# Altium PCB deserializer.PcbDoc (part 1 of 2)
Units mm, origin at the board's own origin, x right, y up, seen from the top; angles counter-clockwise.
Board outline 30 x 20 mm, 8 copper layers (Top Layer, L2 - GND, L3 - SIG, L4 - GND, L5 - PWR, L6 - SIG, L7 - GND, Bottom Layer), stack 1.6 mm thick; 98 components, 66 nets, 306 pads, 169 vias.
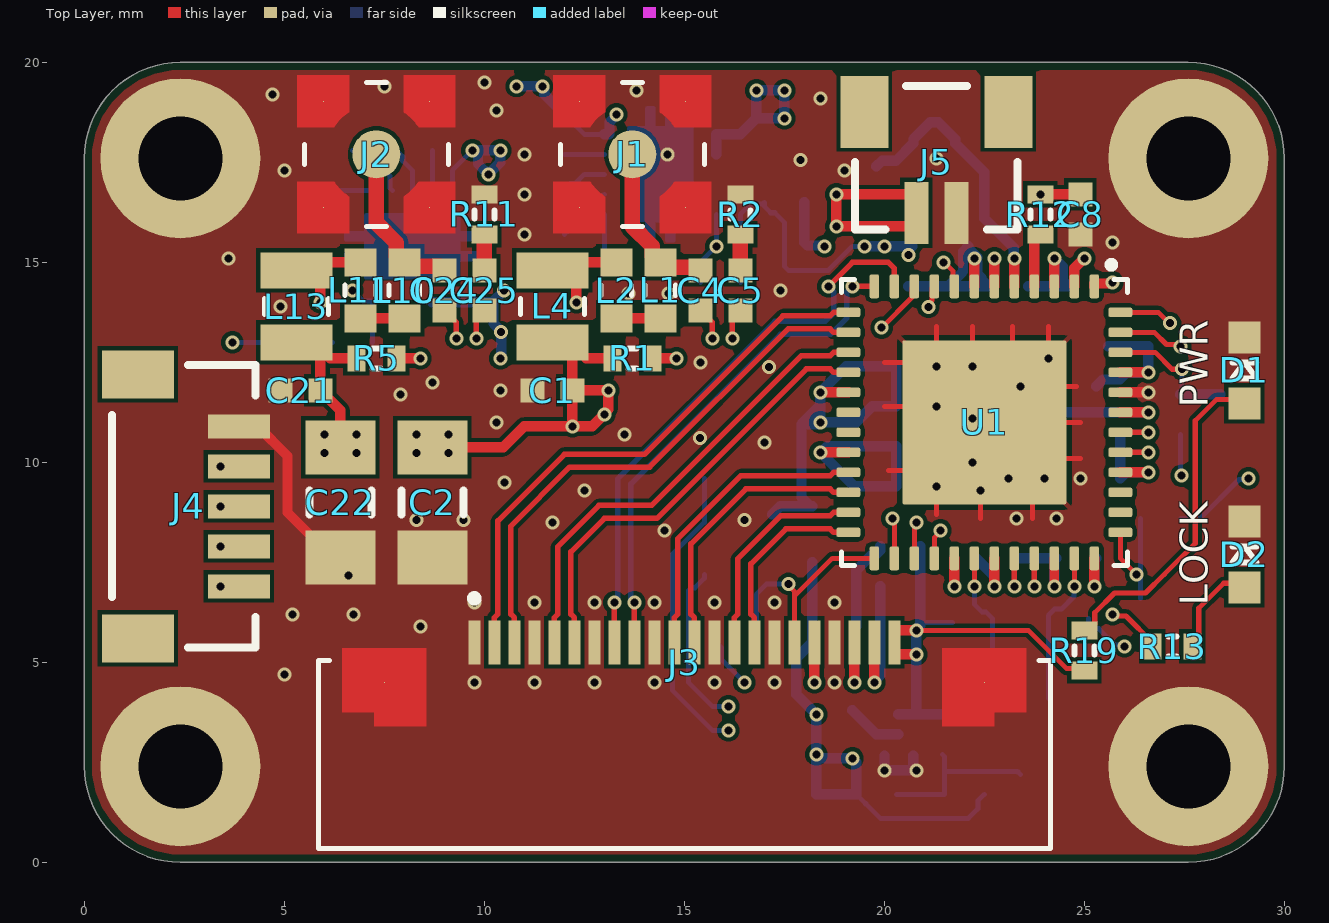
[diagram p0: Top Layer view]
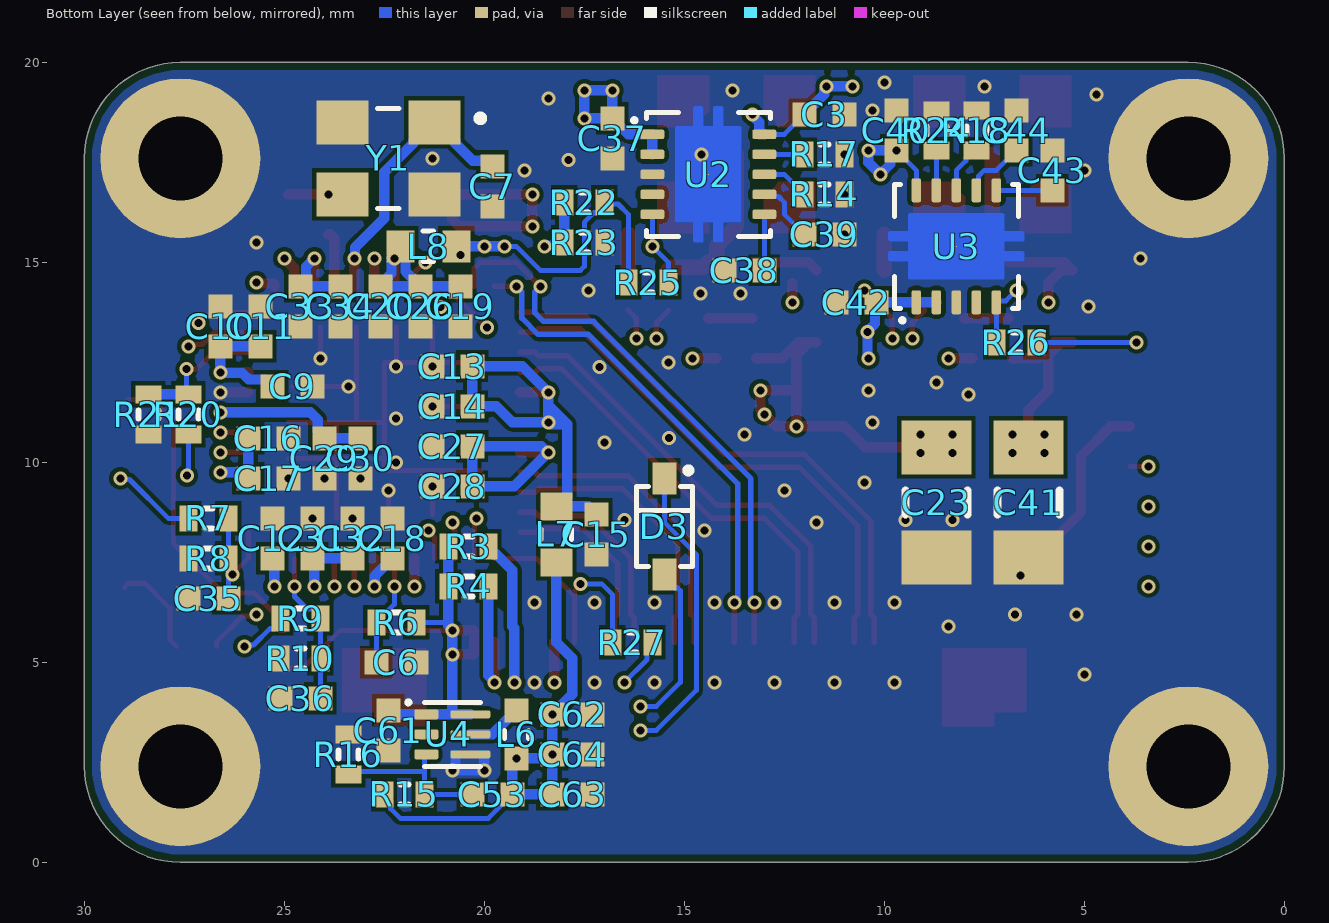
[diagram p1: Bottom Layer view, seen from below]
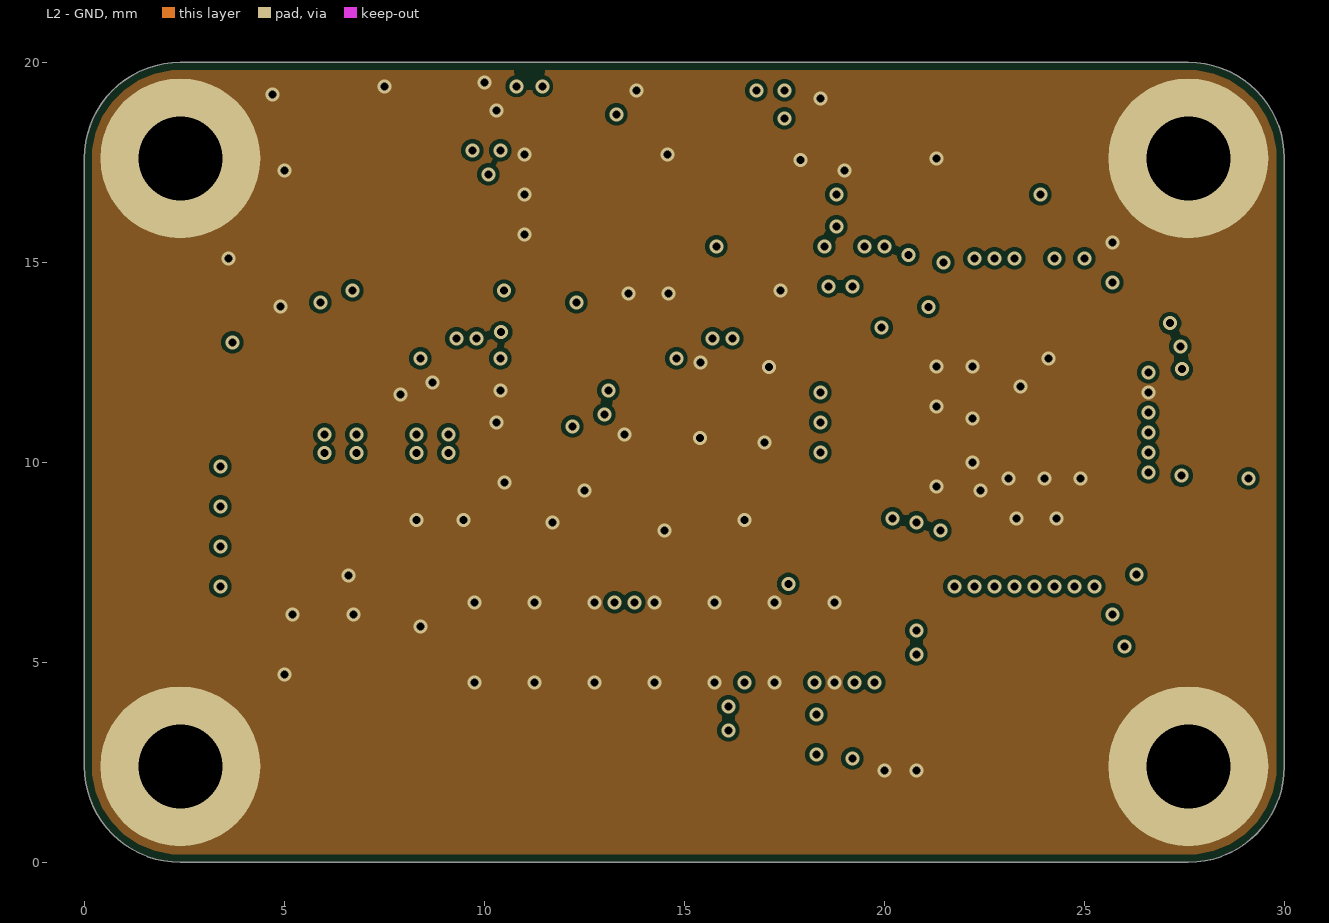
[diagram p2: L2 - GND]
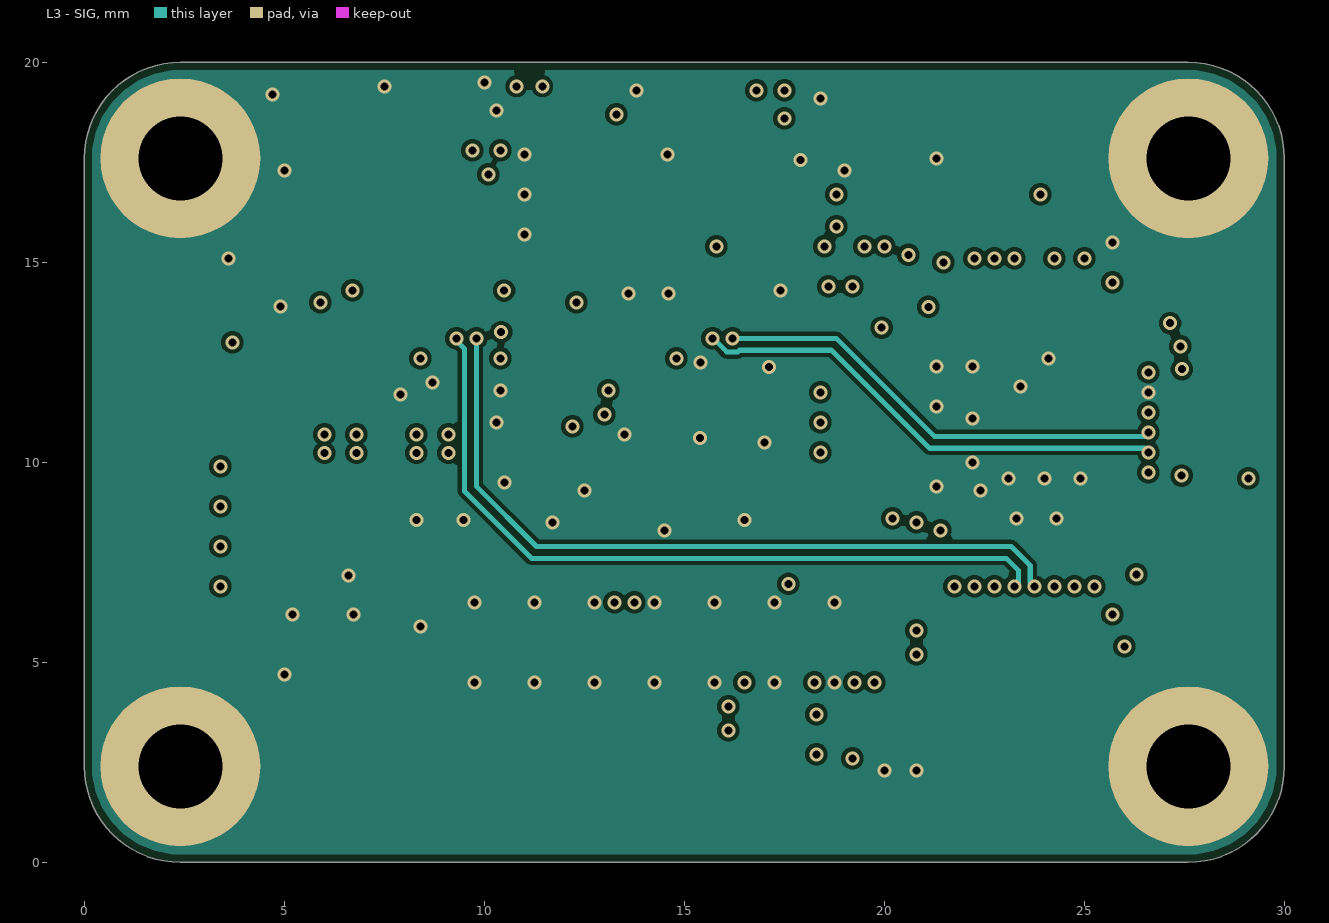
[diagram p3: L3 - SIG]
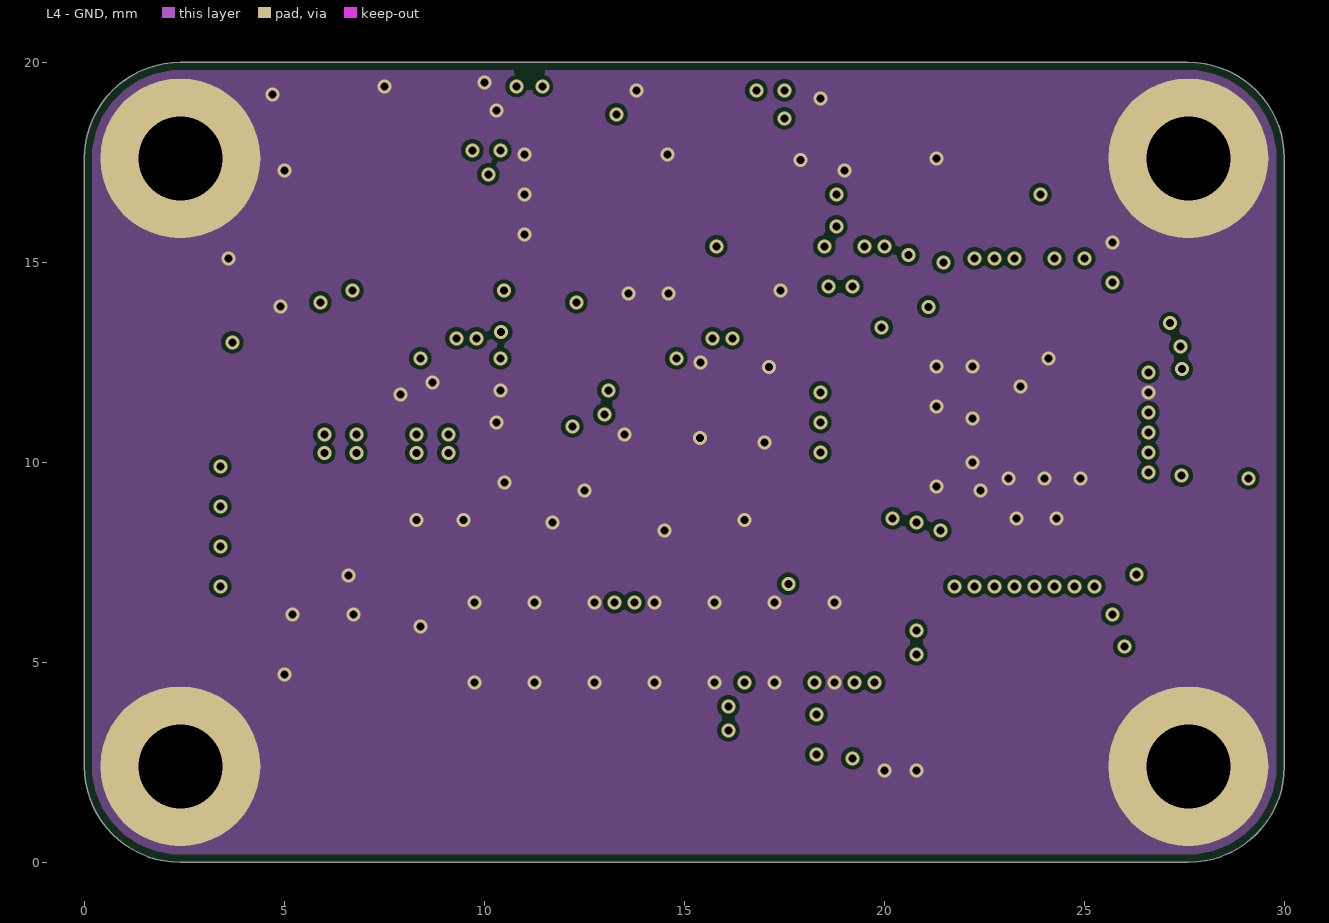
[diagram p4: L4 - GND]
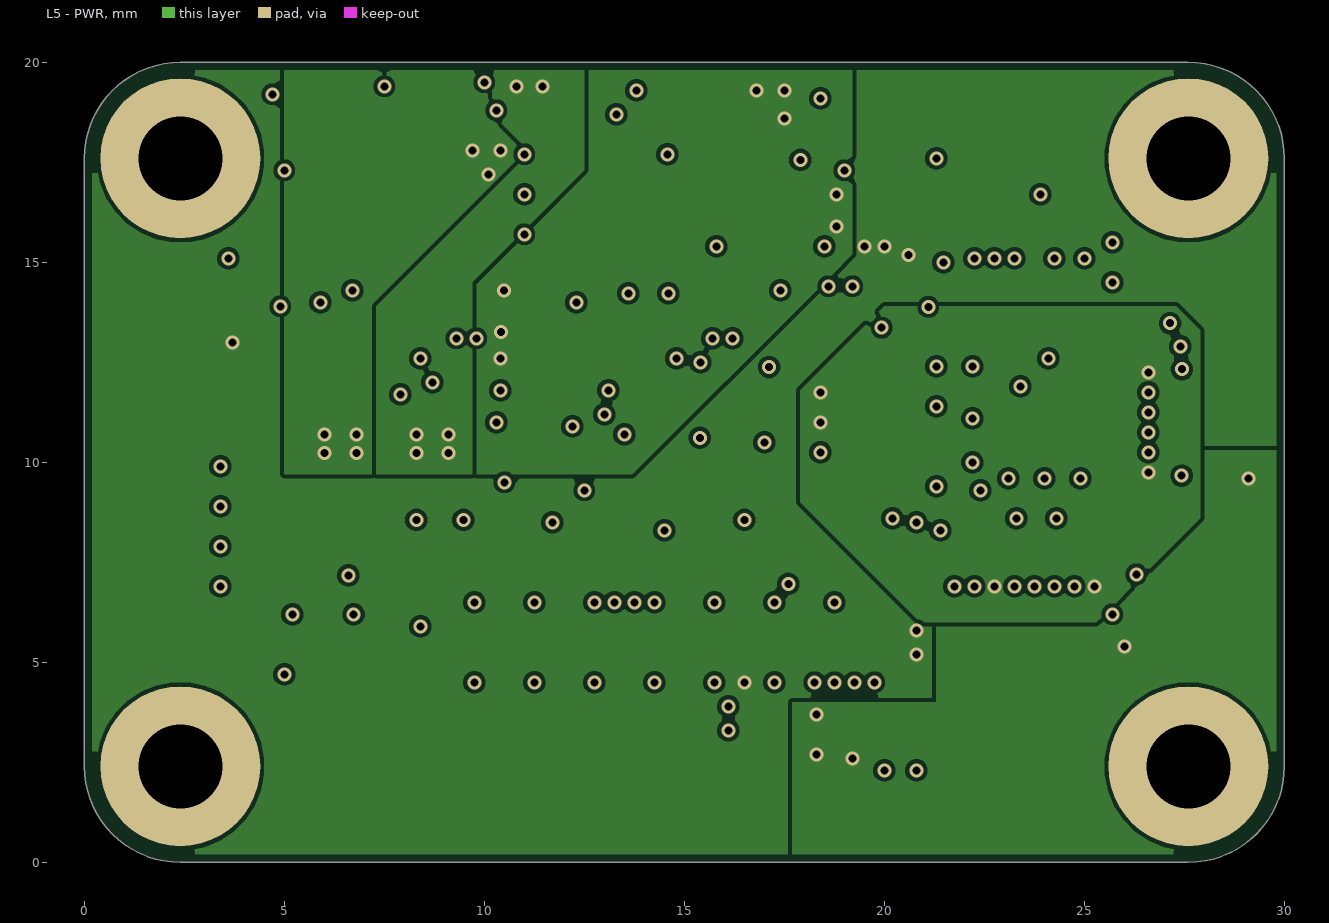
[diagram p5: L5 - PWR]
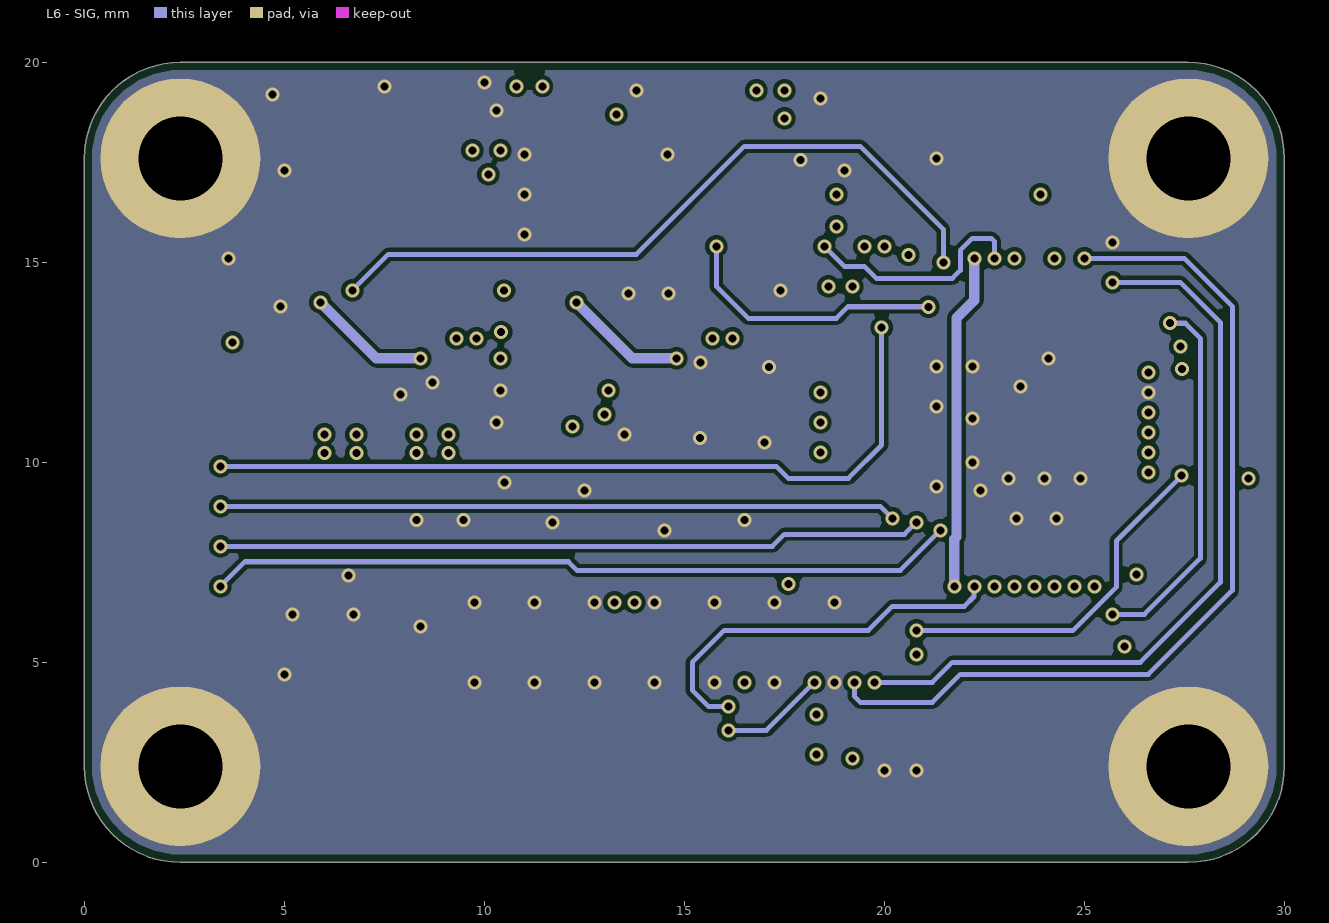
[diagram p6: L6 - SIG]
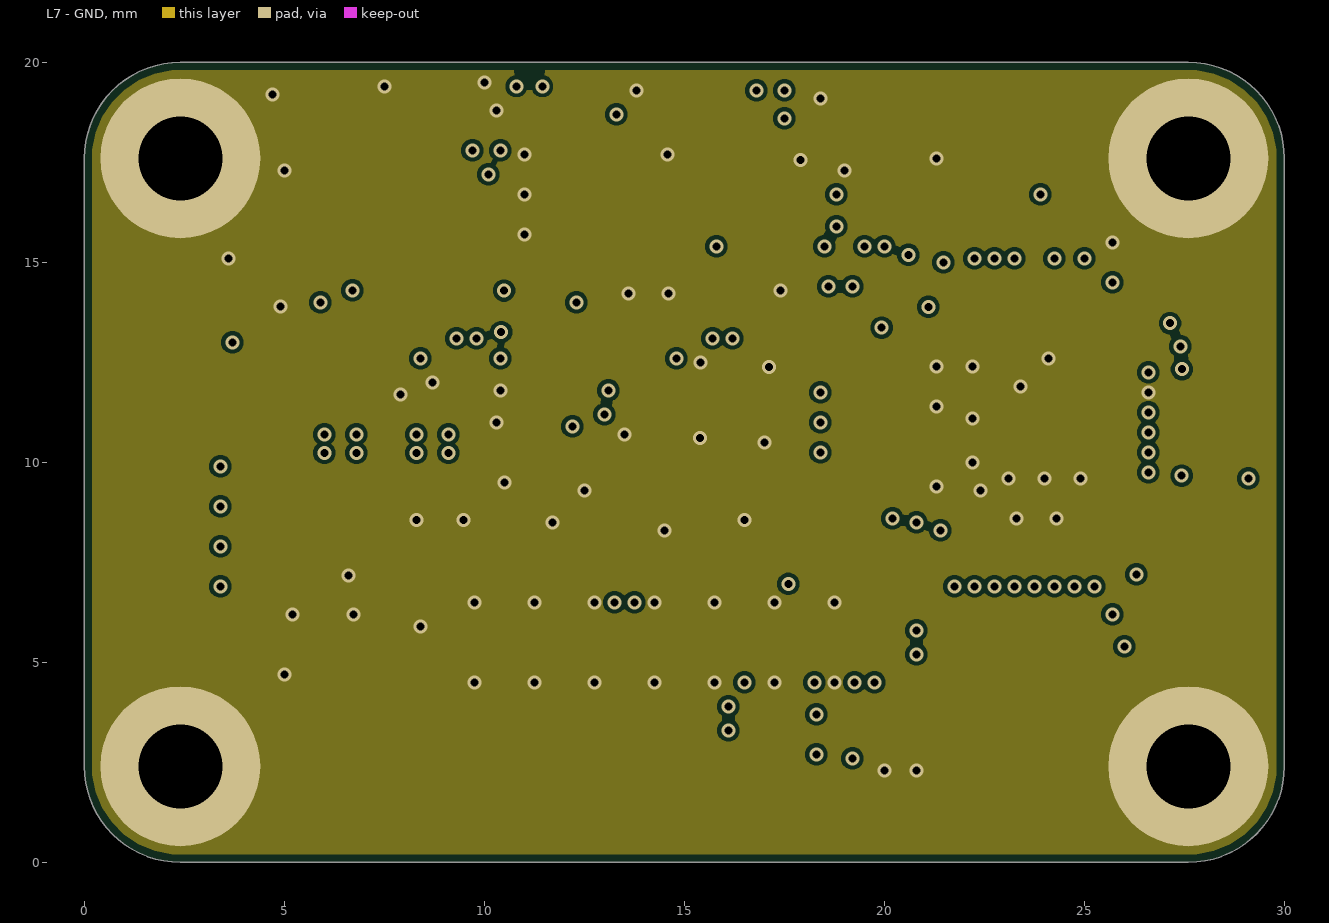
[diagram p7: L7 - GND]
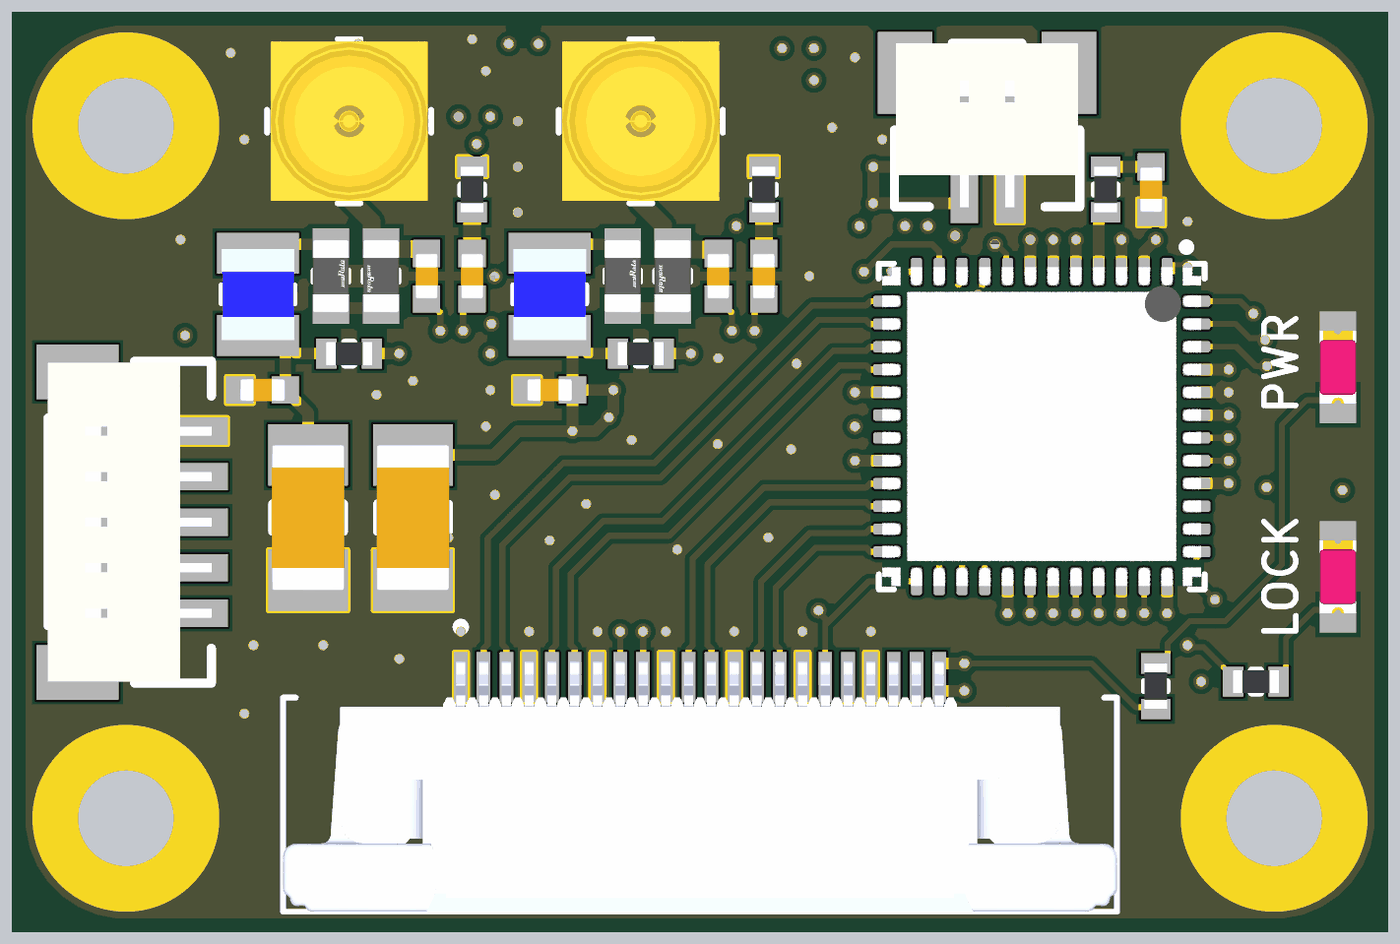
[diagram p9: 3D render of the assembled board from above, using the file's embedded part models]
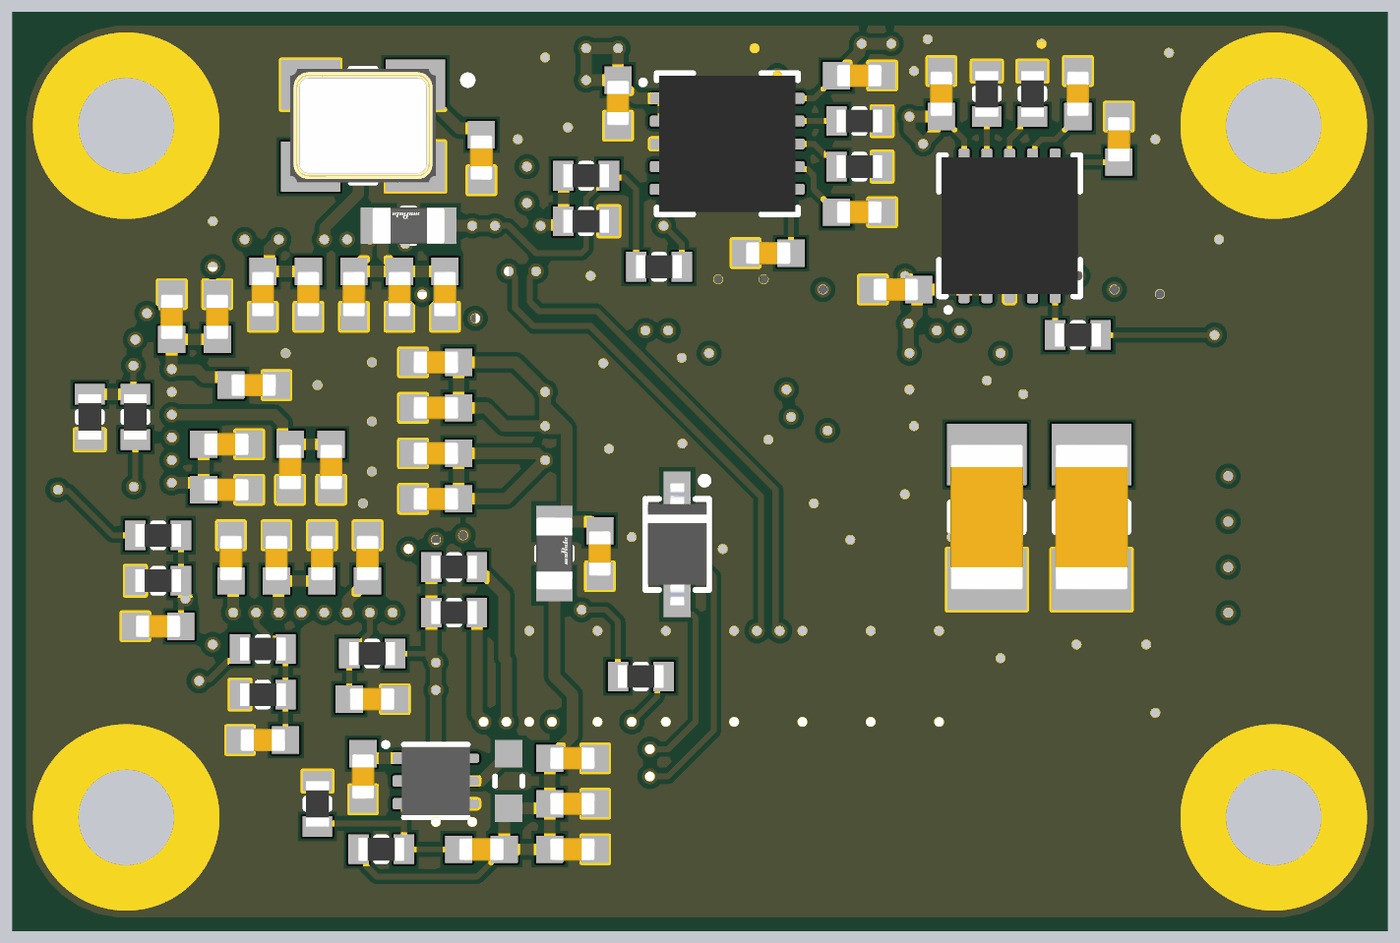
[diagram p10: 3D render of the assembled board from below, using the file's embedded part models]

## Layer stack, top to bottom
Top Solder: solder mask 0.015, SM-001, Dk 4
Top Layer: signal copper 0.035
Dielectric 1: prepreg 0.1164, PP-006, Dk 4.16
L2 - GND: signal copper 0.0152
Dielectric 2: core 0.3, PP-006, Dk 4.2
L3 - SIG: signal copper 0.0152
Dielectric 3: prepreg 0.0764, PP-006, Dk 3.91
Dielectric 4: prepreg 0.0764, PP-006, Dk 3.91
L4 - GND: signal copper 0.0152
Dielectric 5: core 0.3, FR4_TG135_TG150_Dk4.3_Df0.02, Dk 4.2
L5 - PWR: signal copper 0.0152
Dielectric 6: prepreg 0.0764, PP-006, Dk 3.91
Dielectric 7: prepreg 0.0764, PP-006, Dk 3.91
L6 - SIG: signal copper 0.0152
Dielectric 8: core 0.3, PP-006, Dk 4.2
L7 - GND: signal copper 0.0152
Dielectric 9: prepreg 0.1164, PP-006, Dk 4.16
Bottom Layer: signal copper 0.035
Bottom Solder: solder mask 0.015, SM-001, Dk 4

## Board outline
0,2.4 ccw(c2.4,2.4) 2.4,0 27.6,0 ccw(c27.6,2.4) 30,2.4 30,17.6 ccw(c27.6,17.6) 27.6,20 2.4,20 ccw(c2.4,17.6) 0,17.6

## Design rules (kind name [scope] priority, off if disabled: settings)
AssemblyTestPointUsage [All] p1: isadvanced=TRUE
AssemblyTestpoint [All] p1: isadvanced=TRUE testpointundercomponent=TRUE minsize=1.016 maxsize=2.54 preferedsize=1.524 minholesize=0 maxholesize=1.016 preferedholesize=0.813 testpointgrid=0.025 usegrid=TRUE gridoriginx=166.25 gridoriginy=192.7 gridtolerance=0 allowsidetop=TRUE allowsidebottom=TRUE
BoardOutlineClearance BoardOutlineClearance_1 [All] p1: isadvanced=TRUE gap=0.2 ignorepadtopadclearanceinfootprint=FALSE
Clearance Clearance_1 [(ExistsOnLayer('L2 - GND') Or ExistsOnLayer('L3 - SIG') Or ExistsOnLayer('L4 - GND') Or ExistsOnLayer('L5 - PWR') Or ExistsOnLayer('L6 - SIG') Or ExistsOnLayer('L7 - GND')) vs (ExistsOnLayer('L2 - GND') Or ExistsOnLayer('L3 - SIG') Or ExistsOnLayer('L4 - GND') Or ExistsOnLayer('L5 - PWR') Or ExistsOnLayer('L6 - SIG') Or ExistsOnLayer('L7 - GND'))] p1: gap=0.1 ignorepadtopadclearanceinfootprint=FALSE sourcerule=48 cellrowname=All cellrowtype=0 cellcolname=All cellcoltype=0 innerlayers=TRUE
Clearance Clearance_2 [(ExistsOnLayer('Top Layer') Or ExistsOnLayer('Bottom Layer')) vs (ExistsOnLayer('Top Layer') Or ExistsOnLayer('Bottom Layer'))] p2: gap=0.1 ignorepadtopadclearanceinfootprint=FALSE sourcerule=48 cellrowname=All cellrowtype=0 cellcolname=All cellcoltype=0 outerlayers=TRUE
Clearance [All] p3: gap=0.254 ignorepadtopadclearanceinfootprint=FALSE ismatrix=TRUE
ComponentClearance ComponentClearance_LensHolder [InComponent('MP1')] p1: gap=-100 collisioncheckmode=3 verticalgap=-100 showdistances=FALSE
ComponentClearance [All] p2: isadvanced=TRUE gap=0.254 collisioncheckmode=3 verticalgap=0.254 showdistances=FALSE
DiffPairsRouting [All] p1: maxlimit=0.186 minlimit=0.17 mostfreqgap=0.218 toplayer_mingap=0.186 toplayer_prefgap=0.186 toplayer_minwidth=0.137 toplayer_maxwidth=0.137 toplayer_prefwidth=0.137 midlayer4_maxgap=0.17 midlayer4_prefgap=0.17 midlayer4_minwidth=0.128 midlayer4_maxwidth=0.128 midlayer4_prefwidth=0.128 midlayer6_maxgap=0.17 midlayer6_prefgap=0.17 midlayer6_minwidth=0.128 midlayer6_maxwidth=0.128 midlayer6_prefwidth=0.128 bottomlayer_mingap=0.186 bottomlayer_prefgap=0.186 bottomlayer_minwidth=0.137 bottomlayer_maxwidth=0.137 bottomlayer_prefwidth=0.137 impedanceprofiledriven=TRUE impedanceprofileid={41864D3A-BEB3-4887-9D01-447DFB65D12F} impedanceprofilevalue=100.000000 maxuncoupledlength=7
FabricationTestPointUsage [All] p1: isadvanced=TRUE valid=0 allowmultiple=FALSE
FabricationTestpoint [All] p1: isadvanced=TRUE side=3 testpointundercomponent=TRUE minsize=1.016 maxsize=2.54 preferedsize=1.524 minholesize=0 maxholesize=1.016 preferedholesize=0.813 testpointgrid=0.025 allowsidetop=TRUE allowsidebottom=TRUE usegrid=TRUE gridoriginx=166.25 gridoriginy=192.7 gridtolerance=0
FanoutControl Fanout_BGA [IsBGA] p1: isadvanced=TRUE bgadir=Out bgaviamode=Centered fanoutstyle=Auto fanoutdirection=Alternating viagrid=0.025 // Fanout_BGA (Default Rule)
FanoutControl Fanout_LCC [IsLCC] p2: isadvanced=TRUE bgadir=Out bgaviamode=Centered fanoutstyle=Auto fanoutdirection=Alternating viagrid=0.025 // Fanout_LCC (Default Rule)
FanoutControl Fanout_SOIC [IsSOIC] p3: isadvanced=TRUE bgadir=Out bgaviamode=Centered fanoutstyle=Auto fanoutdirection=Alternating viagrid=0.025 // Fanout_SOIC (Default Rule)
FanoutControl Fanout_Small [(CompPinCount < 5)] p4: isadvanced=TRUE bgadir=Out bgaviamode=Centered fanoutstyle=Auto fanoutdirection=OutThenIn viagrid=0.025 // Fanout_Small (Default Rule)
FanoutControl Fanout_Default [All] p5: isadvanced=TRUE bgadir=Out bgaviamode=Centered fanoutstyle=Auto fanoutdirection=Alternating viagrid=0.025 // Fanout_Default (Default Rule)
Height [All] p1: isadvanced=TRUE minheight=0 maxheight=25.4 prefheight=12.7
HoleSize [All] p1: isadvanced=TRUE absolutevalues=TRUE maxlimit=5 minlimit=0.2 maxpercent=80.000 minpercent=20.000
HoleToHoleClearance [All] p1: isadvanced=TRUE gap=0.254 allowstackedmicrovias=TRUE
LayerPairs [All] p1: isadvanced=TRUE enforce=TRUE
MinimumSolderMaskSliver [All] p1: isadvanced=TRUE minsoldermaskwidth=0.1
NetAntennae [All] p1: isadvanced=TRUE netantennaetolerance=0
PasteMaskExpansion [All] p1: isadvanced=TRUE expansion=0
PlaneClearance [All] p1: isadvanced=TRUE clearance=0.254
PlaneConnect [All] p1: isadvanced=TRUE pad.planeconnectstyle=Relief pad.reliefexpansion=0.508 pad.reliefentries=4 pad.reliefconductorwidth=0.254 pad.reliefairgap=0.254 via.planeconnectstyle=Direct via.reliefexpansion=0.508 via.reliefentries=4 via.reliefconductorwidth=0.254 via.reliefairgap=0.254
PolygonConnect PolygonConnect_camera [All vs InComponent('U1')] p1: connectstyle=Relief reliefconductorwidth=0.127 reliefentries=4 polygonreliefangle="45 Angle" airgapwidth=0.127
PolygonConnect PolygonConnectStyle_Direct [IsNamedPolygon('PolygonDirect')] p2: isadvanced=TRUE connectstyle=Direct reliefconductorwidth=0.254 reliefentries=2 polygonreliefangle="0 Angle" airgapwidth=0.254
PolygonConnect [All] p3: connectstyle=Direct reliefconductorwidth=0.127 reliefentries=4 polygonreliefangle="90 Angle" airgapwidth=0.127
RoutingCorners [All] p1: isadvanced=TRUE cornerstyle=45-Degree minsetback=2.54 maxsetback=2.54
RoutingPriority [All] p1: isadvanced=TRUE routingpriority=0
RoutingVias [All] p1: holewidth=0.3 width=0.45 viastyle="Through Hole" minholewidth=0.2 minwidth=0.35 maxholewidth=0.45 maxwidth=0.6
ShortCircuit [All] p1: isadvanced=TRUE allowed=FALSE
SilkToSilkClearance [All] p1: isadvanced=TRUE silktosilkclearance=0.127
SilkToSolderMaskClearance [IsPad] p1: isadvanced=TRUE minsilkscreentomaskgap=0.127 clearancetoexposedcopper=TRUE
SolderMaskExpansion SolderMaskExpansion_via [IsVia] p1: isadvanced=TRUE expansion=0.102 istentingtop=TRUE useseparateexpansions=TRUE expansionbottom=0.102 istentingbottom=TRUE
SolderMaskExpansion [All] p2: isadvanced=TRUE expansion=0.05 istentingtop=FALSE
SupplyNets "Schematic Supply Nets_4" [InNet('24V_VPOC0')] p1: voltage=0.000
SupplyNets "Schematic Supply Nets_1" [InNet('24V_VPOC1')] p2: voltage=0.000
SupplyNets "Schematic Supply Nets_2" [InNet('24V_VPOC')] p3: voltage=0.000
SupplyNets "Schematic Supply Nets_6" [InNet('3V3')] p4: voltage=0.000
SupplyNets "Schematic Supply Nets_3" [InNet('1V8')] p5: voltage=0.000
SupplyNets "Schematic Supply Nets" [InNet('GND')] p6: voltage=0.000
UnRoutedNet [All] p1: isadvanced=TRUE
UnpouredPolygon [All] p1: isadvanced=TRUE
Width Width_S50 [InNetClass('S50')] p1: maxlimit=0.389 minlimit=0.151 preferedwidth=0.389 toplayer_minwidth=0.389 bottomlayer_minwidth=0.389 impedanceprofiledriven=TRUE minimp=50.000000 maximp=50.000000 favimp=50.000000
Width [All] p2: maxlimit=0.254 minlimit=0.127 preferedwidth=0.254
3 further rules are at their usual default settings.

## Classes and differential pairs
component class Top: C1 C2 C4 C5 C21 C22 C24 C25 D2 D3 J1 J2 J3 J4 J5 L1 L2 L4 L10 L11 L13 R1 R2 R5 R11 R13 R27
component class U_deserializer: C6 C7 C8 C9 C10 C11 C12 C13 C14 C15 C16 C17 C18 C19 C20 C26 C27 C28 C29 C30 C31 C32 C33 C34 C35 C36 L7 L8 R3 R4 R6 R7 R8 R9 R10 R12 R20 R21 R22 R23 U1 Y1
net class S50: FPD0_DATA FPD0_DOUT_C_N FPD1_DATA FPD1_DOUT_C_N
component class U_Power: C3 C23 C37 C38 C39 C40 C41 C42 C43 C44 C53 C61 C62 C63 C64 D1 L6 R14 R15 R16 R17 R18 R19 R24 R25 R26 U2 U3 U4
differential pair MIPI.CLK: +MIPI.CLK_P -MIPI.CLK_N
differential pair MIPI.D3: +MIPI.D3_P -MIPI.D3_N
differential pair MIPI.D2: +MIPI.D2_P -MIPI.D2_N
differential pair MIPI.D1: +MIPI.D1_P -MIPI.D1_N
differential pair MIPI.D0: +MIPI.D0_P -MIPI.D0_N
differential pair FPD1.DATA: +FPD1.DATA_P -FPD1.DATA_N
differential pair FPD0.DATA: +FPD0.DATA_P -FPD0.DATA_N

## Components (designator, comment, footprint, x,y, rotation, side; value= is the part's Value field where it differs from the comment)
C1 "GRT155R71H104KE01D" "Generic 0402 capacitor" 11.7,11.8 r0 top value=100nF
C2 "CL31A106MBHNNNE" "Generic 1206 Capacitor" 8.7,9 r90 top value=10µF
C3 "GRT155R71H104KE01D" "Generic 0402 capacitor" 11.5,18.7 r0 bottom value=100nF
C4 "GRM155R71H473KE14D" "Generic 0402 capacitor" 15.4,14.3 r90 top value=47nF
C5 "GRM155R71H473KE14D" "Generic 0402 capacitor" 16.4,14.3 r90 top value=47nF
C6 "GRT155C80J106ME13J" "Generic 0402 capacitor" 22.2,5 r0 bottom value=10µF
C7 "GRT1555C1E120JA02J" "Generic 0402 capacitor" 19.8,16.9 r90 bottom value=12pF
C8 "GRT1555C1E120JA02J" "Generic 0402 capacitor" 24.9,16.2 r90 top value=12pF
C9 "GRT155C80J106ME13J" "Generic 0402 capacitor" 24.8,11.9 r0 bottom value=10µF
C10 "GRT155R71H104KE01D" "Generic 0402 capacitor" 26.6,13.4 r270 bottom value=100nF
C11 "GRT155R71H104KE01D" "Generic 0402 capacitor" 25.6,13.4 r270 bottom value=100nF
C12 "GRT155R71H104KE01D" "Generic 0402 capacitor" 25.3,8.1 r270 bottom value=100nF
C13 "GRT155C80J106ME13J" "Generic 0402 capacitor" 20.8,12.4 r180 bottom value=10µF
C14 "GRT155R71H104KE01D" "Generic 0402 capacitor" 20.8,11.4 r180 bottom value=100nF
C15 "GRT155C80J106ME13J" "Generic 0402 capacitor" 17.2,8.2 r90 bottom value=10µF
C16 "GRT155R71H104KE01D" "Generic 0402 capacitor" 25.4,10.6 r0 bottom value=100nF
C17 "GRT155R71H104KE01D" "Generic 0402 capacitor" 25.4,9.6 r0 bottom value=100nF
C18 "GRT155R71H104KE01D" "Generic 0402 capacitor" 22.3,8.1 r270 bottom value=100nF
C19 "MAASL105CD7105MFCA01" "Generic 0402 capacitor" 20.6,13.9 r90 bottom value=1µF
C20 "GRT155R71H104KE01D" "Generic 0402 capacitor" 22.6,13.9 r90 bottom value=100nF
C21 "GRT155R71H104KE01D" "Generic 0402 capacitor" 5.4,11.8 r0 top value=100nF
C22 "CL31A106MBHNNNE" "Generic 1206 Capacitor" 6.4,9 r90 top value=10µF
C23 "CL31A106MBHNNNE" "Generic 1206 Capacitor" 8.7,9 r90 bottom value=10µF
C24 "GRM155R71H473KE14D" "Generic 0402 capacitor" 9,14.3 r90 top value=47nF
C25 "GRM155R71H473KE14D" "Generic 0402 capacitor" 10,14.3 r90 top value=47nF
C26 "GRT155R71H104KE01D" "Generic 0402 capacitor" 21.6,13.9 r90 bottom value=100nF
C27 "GRT155R61A475ME13D" "Generic 0402 capacitor" 20.8,10.4 r180 bottom value=4.7µF
C28 "GRT155R71H104KE01D" "Generic 0402 capacitor" 20.8,9.4 r180 bottom value=100nF
C29 "GRT155R61A475ME13D" "Generic 0402 capacitor" 24,10.1 r90 bottom value=4.7µF
C30 "GRT155R71H104KE01D" "Generic 0402 capacitor" 23.1,10.1 r90 bottom value=100nF
C31 "GRT155R61A475ME13D" "Generic 0402 capacitor" 24.3,8.1 r270 bottom value=4.7µF
C32 "GRT155R71H104KE01D" "Generic 0402 capacitor" 23.3,8.1 r270 bottom value=100nF
C33 "GRT155R61A475ME13D" "Generic 0402 capacitor" 24.6,13.9 r90 bottom value=4.7µF
C34 "GRT155R71H104KE01D" "Generic 0402 capacitor" 23.6,13.9 r90 bottom value=100nF
C35 "GRT155R71H104KE01D" "Generic 0402 capacitor" 26.9,6.6 r180 bottom value=100nF
C36 "GRT155R71H104KE01D" "Generic 0402 capacitor" 24.6,4.1 r180 bottom value=100nF
C37 "GRT155R71H104KE01D" "Generic 0402 capacitor" 16.8,18.1 r90 bottom value=100nF
C38 "GRT155R71H104KE01D" "Generic 0402 capacitor" 13.5,14.8 r180 bottom value=100nF
C39 "GCM155R72A472KA37D" "Generic 0402 capacitor" 11.5,15.7 r0 bottom value=4.7nF
C40 "GRT155R71H104KE01D" "Generic 0402 capacitor" 9.7,18.3 r270 bottom value=100nF
C41 "CL31A106MBHNNNE" "Generic 1206 Capacitor" 6.4,9 r90 bottom value=10µF
C42 "GRT155R71H104KE01D" "Generic 0402 capacitor" 10.7,14 r180 bottom value=100nF
C43 "GRT155R71H104KE01D" "Generic 0402 capacitor" 5.8,17.3 r270 bottom value=100nF
C44 "GCM155R72A472KA37D" "Generic 0402 capacitor" 6.7,18.3 r270 bottom value=4.7nF
C53 "GCM155R72A102KA37J" "Generic 0402 capacitor" 19.8,1.7 r180 bottom value=1nF
C61 "GRT155R61A475ME13D" "Generic 0402 capacitor" 22.4,3.3 r270 bottom value=4.7µF
C62 "GRT155R71H104KE01D" "Generic 0402 capacitor" 17.8,3.7 r180 bottom value=100nF
C63 "GRT155C80J106ME13J" "Generic 0402 capacitor" 17.8,1.7 r0 bottom value=10µF
C64 "GRT155C80J106ME13J" "Generic 0402 capacitor" 17.8,2.7 r0 bottom value=10µF
D1 "SML-D12V8WT86C" FP-SML-D12-MFG 29,12.3 r270 top
D2 "SML-D12V8WT86C" FP-SML-D12-MFG 29,7.7 r270 top
D3 "SD103BWSHE3-TP" SOD-323 15.5,8.4 r270 bottom
J1 "MMCX-J-P-H-ST-SM1" MMCX-J-P-H-ST-SM1 13.7,17.7 r0 top
J2 "MMCX-J-P-H-ST-SM1" MMCX-J-P-H-ST-SM1 7.3,17.7 r0 top
J3 "F32Q-1A7H1-11022" F32Q-1A7H1-11022 15,2.7 r0 top
J4 "BM05B-SRSS-TB(LF)(SN)" "JST BM05B-SRSS-TB" 2.6,8.9 r90 top
J5 "BM02B-SRSS-TB(LF)(SN)" "JST BM02B-SRSS-TB" 21.3,17.5 r0 top
L1 "BLM18HE152SN1D" 0603_1.6x0.8x0.8mm_IND#1 14.4,14.3 r270 top
L2 "BLM18HE152SN1D" 0603_1.6x0.8x0.8mm_IND#1 13.3,14.3 r90 top
L4 "BRC2016T100K" 0805_2.0x1.6x1.6mm_IND 11.7,13.9 r270 top value=10µH
L6 "ASMPH-0603-R47M-T" 0603_1.6x0.8x0.8mm_IND#2 19.2,3.2 r270 bottom value=470nH
L7 "BLM18HE152SN1D" 0603_1.6x0.8x0.8mm_IND#1 18.2,8.2 r90 bottom
L8 "BLM18HE152SN1D" 0603_1.6x0.8x0.8mm_IND#1 21.4,15.4 r0 bottom
L10 "BLM18HE152SN1D" 0603_1.6x0.8x0.8mm_IND#1 8,14.3 r270 top
L11 "BLM18HE152SN1D" 0603_1.6x0.8x0.8mm_IND#1 6.9,14.3 r90 top
L13 "BRC2016T100K" 0805_2.0x1.6x1.6mm_IND 5.3,13.9 r270 top value=10µH
R1 "RCA04024K02FKEDSR" "Generic 0402 Resistor" 13.7,12.6 r180 top value=4.02k
R2 "RMCA0402FT49R9-HP" "Generic 0402 Resistor" 16.4,16.2 r270 top value=49.9
R3 "RMCF0402JT1K50" "Generic 0402 Resistor" 20.4,7.9 r0 bottom value=1.5k
R4 "RMCF0402JT1K50" "Generic 0402 Resistor" 20.4,6.9 r0 bottom value=1.5k
R5 "RCA04024K02FKEDSR" "Generic 0402 Resistor" 7.3,12.6 r180 top value=4.02k
R6 "RNCP0402FTD10K0" "Generic 0402 Resistor" 22.2,6 r180 bottom value=10k
R7 "WR04X7502FTL" "Generic 0402 Resistor" 26.9,8.6 r0 bottom value=75k
R8 "WR04X1003FTL" "Generic 0402 Resistor" 26.9,7.6 r180 bottom value=100k
R9 "AC0402FR-0736KL" "Generic 0402 Resistor" 24.6,6.1 r0 bottom value=36k
R10 "AC0402FR-0736KL" "Generic 0402 Resistor" 24.6,5.1 r180 bottom value=36k
R11 "RMCA0402FT49R9-HP" "Generic 0402 Resistor" 10,16.2 r270 top value=49.9
R12 "WR04X000PTL" "Generic 0402 Resistor" 23.9,16.2 r270 top value=0
R13 "RMCF0402FT330R" "Generic 0402 Resistor" 27.2,5.4 r0 top value=330
R14 "AC0402FR-7W22KL" "Generic 0402 Resistor" 11.5,16.7 r0 bottom value=22k
R15 "WR04X1003FTL" "Generic 0402 Resistor" 22,1.7 r0 bottom value=100k
R16 "560112110041" "Generic 0402 Resistor" 23.4,2.7 r270 bottom value=200k
R17 "AC0402FR-7W22KL" "Generic 0402 Resistor" 11.5,17.7 r0 bottom value=22k
R18 "AC0402FR-7W22KL" "Generic 0402 Resistor" 7.7,18.3 r270 bottom value=22k
R19 "RMCF0402FT330R" "Generic 0402 Resistor" 25,5.3 r90 top value=330
R20 "WR04X000PTL" "Generic 0402 Resistor" 27.4,11.2 r270 bottom value=0
R21 "WR04X000PTL" "Generic 0402 Resistor" 28.4,11.2 r90 bottom value=0
R22 "WR04X000PTL" "Generic 0402 Resistor" 17.5,16.5 r180 bottom value=0
R23 "WR04X000PTL" "Generic 0402 Resistor" 17.5,15.5 r0 bottom value=0
R24 "AC0402FR-7W22KL" "Generic 0402 Resistor" 8.7,18.3 r270 bottom value=22k
R25 "RNCP0402FTD10K0" "Generic 0402 Resistor" 15.9,14.5 r0 bottom value=10k
R26 "RNCP0402FTD10K0" "Generic 0402 Resistor" 6.7,13 r180 bottom value=10k
R27 "RNCP0402FTD10K0" "Generic 0402 Resistor" 16.3,5.5 r180 bottom value=10k
U1 "DS90UB954TRGZTQ1" VQFN-48_7x7x1.0mm_P0.5mm 22.5,11 r270 top
U2 "TPS16412DRCR" VSON-10_3x3x1.0mm_P0.5mm 14.4,17.2 r180 bottom
U3 "TPS16412DRCR" VSON-10_3x3x1.0mm_P0.5mm 8.2,15.4 r90 bottom
U4 "TPS62824DMQR" VSON_HR-6_1.5x1.5x1.0mm_P0.5mm 20.8,3.2 r180 bottom
Y1 "ECS-250-12-33B2Q-JES-TR3" ECS-250-12-33B2Q-JES-TR3 22.4,17.6 r0 bottom

## Footprints (in the part's own frame and the unit in brackets; to place one, negate y for a bottom-side part, rotate by r counter-clockwise, add the part's x,y. Pads: shape width x height; smd on the part's side, far side on the other; paste and mask are expansions set on the pad)
0603_1.6x0.8x0.8mm_IND#1 [mm] "BLM18HE152SN1D"
  rect 0.7x0.8 smd paste+0 mask+0: 1(-0.7,0) 2(0.7,0)
  silkscreen extent -0.13,-0.38 0.13,0.38, body extent -0.8,-0.4 0.8,0.4, height 0.95
0603_1.6x0.8x0.8mm_IND#2 [mm] "Abracon 0603 inductor"
  rect 0.6x0.6 smd paste+0 mask+0: 1(-0.6,0) 2(0.6,0)
  silkscreen extent -0.1,-0.3 0.1,0.3, body extent -0.8,-0.4 0.8,0.4, height 0.8
0805_2.0x1.6x1.6mm_IND [mm] "BRC2016T100K inductor"
  rect 0.9x1.8 smd: 1(-0.9,0) 2(0.9,0)
  silkscreen extent -0.2,-0.8 0.2,0.8, body extent -1,-0.8 1,0.8, height 1.8
ECS-250-12-33B2Q-JES-TR3 [mm] "3.2x2.5"
  rect 1.3x1.1 smd: 1(-1.15,-0.9) 2(1.15,-0.9) 3(1.15,0.9) 4(-1.15,0.9)
  silkscreen extent -2.37,-1.25 0.27,1.25, body extent -1.6,-1.25 1.6,1.25, height 0.8
F32Q-1A7H1-11022 [mm] "ZIF 22 pin, 0.5mm pitch"
  rect 0.3x1.1 smd: 1(-5.25,2.8) 2(-4.75,2.8) 3(-4.25,2.8) 4(-3.75,2.8) 5(-3.25,2.8) 6(-2.75,2.8) 7(-2.25,2.8) 8(-1.75,2.8) 9(-1.25,2.8) 10(-0.75,2.8) 11(-0.25,2.8) 12(0.25,2.8) 13(0.75,2.8) 14(1.25,2.8) 15(1.75,2.8) 16(2.25,2.8) 17(2.75,2.8) 18(3.25,2.8) 19(3.75,2.8) 20(4.25,2.8) 21(4.75,2.8) 22(5.25,2.8)
  round 0.025 smd: SH1(-7.5,1.8) SH2(7.5,1.8)
  silkscreen extent -9.15,-2.35 9.15,3.98, body extent -9.15,-2.35 9.15,3.15, height 2.05
FP-SML-D12-MFG [mm]
  rect 0.8x0.8 smd paste+0 mask+0: 1(-0.825,0) 2(0.825,0)
  silkscreen extent -0.2,-0.3 0.2,0.3, body extent -0.8,-0.4 0.8,0.4, height 0.56
"Generic 0402 capacitor" [mm] "Generic 0402 capacitor"
  rect 0.6x0.6 smd: 1(-0.5,0) 2(0.5,0)
  body extent -0.5,-0.25 0.5,0.25, height 0.5
"Generic 0402 Resistor" [mm]
  rect 0.45x0.65 smd: 1(-0.5,0) 2(0.5,0)
  silkscreen extent -0.1,-0.25 0.1,0.25, body extent -0.5,-0.25 0.5,0.25, height 0.35
"Generic 1206 Capacitor" [mm] "Chip Capacitor, 2-Leads, Body 3.20x1.60mm, IPC Medium Density"
  rect 1.35x1.75 smd: 1(-1.375,0) 2(1.375,0)
  silkscreen extent -0.3,-0.77 0.3,0.77, body extent -1.6,-0.8 1.6,0.8, height 1.6
"JST BM02B-SRSS-TB" [mm] "1.0mm pitch/Disconnectable Crimp style connector"
  rect 0.6x1.55 smd: 1(-0.5,-1.262) 2(0.5,-1.262)
  rect 1.2x1.8 smd: M(-1.8,1.262) M(1.8,1.262)
  silkscreen extent -2.03,-1.68 2.03,1.91, body extent -2,-1.69 2,1.91, height 4.32
"JST BM05B-SRSS-TB" [mm] "1.0mm pitch/Disconnectable Crimp style connector"
  rect 0.6x1.55 smd: 1(-2,-1.262) 2(-1,-1.262) 3(0,-1.262) 4(1,-1.262) 5(2,-1.262)
  rect 1.2x1.8 smd: M(-3.3,1.262) M(3.3,1.262)
  silkscreen extent -3.53,-1.68 3.53,1.91, body extent -3.5,-1.69 3.5,1.91, height 4.32
MMCX-J-P-H-ST-SM1 [mm]
  round 1.2 smd: 1(0,0)
  round 0.025 smd: S1(-1.325,1.325) S2(1.325,1.325) S3(1.325,-1.325) S4(-1.325,-1.325)
  silkscreen extent -1.8,-1.8 1.8,1.8, body extent -1.73,-1.75 1.73,1.75, height 5
SOD-323 [mm]
  rect 0.8x0.6 smd paste+0 mask+0: 1(-1.2,0) 2(1.2,0)
  silkscreen extent -1.45,-0.7 1,0.7, body extent -1.34,-0.65 1.34,0.65, height 1.15
VQFN-48_7x7x1.0mm_P0.5mm [mm] "TI 48-VFQFN (7x7)"
  rrect42% 0.6x0.24 smd: 1(-3.4,2.75) 2(-3.4,2.25) 3(-3.4,1.75) 4(-3.4,1.25) 5(-3.4,0.75) 6(-3.4,0.25) 7(-3.4,-0.25) 8(-3.4,-0.75) 9(-3.4,-1.25) 10(-3.4,-1.75) 11(-3.4,-2.25) 12(-3.4,-2.75) 25(3.4,-2.75) 26(3.4,-2.25) 27(3.4,-1.75) 28(3.4,-1.25) 29(3.4,-0.75) 30(3.4,-0.25) 31(3.4,0.25) 32(3.4,0.75) 33(3.4,1.25) 34(3.4,1.75) 35(3.4,2.25) 36(3.4,2.75)
  rrect42% 0.24x0.6 smd: 13(-2.75,-3.4) 14(-2.25,-3.4) 15(-1.75,-3.4) 16(-1.25,-3.4) 17(-0.75,-3.4) 18(-0.25,-3.4) 19(0.25,-3.4) 20(0.75,-3.4) 21(1.25,-3.4) 22(1.75,-3.4) 23(2.25,-3.4) 24(2.75,-3.4) 37(2.75,3.4) 38(2.25,3.4) 39(1.75,3.4) 40(1.25,3.4) 41(0.75,3.4) 42(0.25,3.4) 43(-0.25,3.4) 44(-0.75,3.4) 45(-1.25,3.4) 46(-1.75,3.4) 47(-2.25,3.4) 48(-2.75,3.4)
  rrect2% 4.1x4.1 smd: 49(0,0)
  silkscreen extent -4.01,-3.57 3.57,3.57, body extent -3.8,-3.8 3.8,3.8, height 0.25
VSON-10_3x3x1.0mm_P0.5mm [mm] "TI 10-VSON (3x3)"
  rrect41% 0.6x0.24 smd: 1(-1.4,1) 2(-1.4,0.5) 3(-1.4,0) 4(-1.4,-0.5) 5(-1.4,-1) 6(1.4,-1) 7(1.4,-0.5) 8(1.4,0) 9(1.4,0.5) 10(1.4,1)
  round 0.025 smd: 11(0,0)
  silkscreen extent -1.9,-1.55 1.55,1.55, body extent -1.5,-1.5 1.5,1.5, height 1
VSON_HR-6_1.5x1.5x1.0mm_P0.5mm [mm] "TI SOT-23-5"
  rrect40% 0.6x0.25 smd: 1(-0.65,0.5) 2(-0.65,0) 3(-0.65,-0.5)
  rrect50% 1x0.2 smd: 4(0.45,-0.5) 5(0.45,0) 6(0.45,0.5)
  silkscreen extent -1.15,-0.8 0.7,0.85, body extent -0.75,-0.75 0.75,0.75, height 1

## Part data
C1 C3 C10 C11 C12 C14 C16 C17 C18 C20 C21 C26 C28 C30 C32 C34 C35 C36 C37 C38 C40 C42 C43 C62: library part CMP-001-00084-12, "Ceramic Capacitor, Multilayer, Ceramic, 50V, 10% +Tol, 10% -Tol, X7R, 15% TC, 0.1uF, Surface Mount, 0402", Capacitor Type=Ceramic, Case/Package=0402, Max Operating Temperature=125°C, Min Operating Temperature=-55°C, Package Shape=Rectangular, Temperature Coefficient=X7R, Tolerance=10%, Voltage Rating=50V, AECQ=Yes, Dielectric Material=Ceramic, Mounting Technology="Surface Mount", Multilayer=Yes, Packaging="Tape and Reel", Pins=2, Reach SVHC Compliant=Yes, RoHS Compliant=Yes, Terminal Finish=Nickel, Termination=Wraparound
  C10: PlaceNear=C10.2:U1.45:5mm
  C11: PlaceNear=C11.2:U1.45:5mm
  C12: PlaceNear=C12.2:U1.36:5mm
  C14: PlaceNear=C14.2:U1.17:5mm
  C16: PlaceNear=C16.2:U1.40:5mm
  C17: PlaceNear=C17.2:U1.40:5mm
  C18: PlaceNear=C18.2:U1.31:5mm
  C28: PlaceNear=C28.2:U1.20:5mm
  C30: PlaceNear=C30.2:U1.43:5mm
  C32: PlaceNear=C32.2:U1.34:5mm
  C34: PlaceNear=C34.2:U1.3:5mm
C2 C22 C23 C41: library part CMP-001-00092-6, "Ceramic Capacitor, Multilayer, Ceramic, 50V, 20% +Tol, 20% -Tol, X5R, 15% TC, 10uF, Surface Mount, 1206", Capacitor Type=Ceramic, Case/Package=1206, Max Operating Temperature=85°C, Min Operating Temperature=-55°C, Package Shape=Rectangular, Temperature Characteristics Code=X5R, Tolerance=20%, Voltage Rating=50V, AECQ=No, Dielectric Material=Ceramic, JESD-609 Code=e3, Mounting Technology="Surface Mount", Multilayer=Yes, Packaging="Tape and Reel", Pins=2, Reach SVHC Compliant=Yes, RoHS Compliant=Yes, Temperature Coefficient=X5R, Terminal Finish=Nickel, Termination=Wraparound
C4 C5 C24 C25: library part CMP-001-00113-1, "50V 47nF X7R ±10% 0402 Multilayer Ceramic Capacitors MLCC - SMD/SMT ROHS", Capacitor Type=Ceramic, Case/Package=0402, Max Operating Temperature=125°C, Min Operating Temperature=-55°C, Tolerance=10%, Voltage Rating=50V, AECQ=No, Mounting Technology=SMD, Pins=2
C6 C9 C13 C15 C63 C64: library part CMP-001-00108-2, "Multilayer Ceramic Capacitors MLCC - SMD/SMT 0402 10uF 6.3VDC 20% X6S AEC-Q200", Capacitor Type=Ceramic, Case/Package=0402, Max Operating Temperature=105°C, Min Operating Temperature=-55°C, Temperature Coefficient=X6S, Tolerance=20%, Voltage Rating=6.3V, AECQ=Yes, Mounting Technology="Surface Mount", Pins=2, RoHS Compliant=Yes
  C9: PlaceNear=C9.2:U1.45:5mm
  C13: PlaceNear=C13.2:U1.17:5mm
C7 C8: library part CMP-001-00109-2, "Ceramic Capacitor, Multilayer, Ceramic, 25V, 5% +Tol, 5% -Tol, C0G, 30ppm/Cel TC, 0.000012uF, Surface Mount, 0402", Capacitor Type=Ceramic, Case/Package=0402, Max Operating Temperature=125°C, Min Operating Temperature=-55°C, Temperature Coefficient=C0G, Tolerance=5%, Voltage Rating=25V, AECQ=Yes, Mounting Technology="Surface Mount", Pins=2, RoHS Compliant=Yes
C19: library part CMP-001-00104-2, "Cap Cer 1UF 20V X7T 0402", Capacitor Type=Ceramic, Case/Package=0402, Max Operating Temperature=125°C, Min Operating Temperature=-55°C, Temperature Coefficient=X7R, Tolerance=20%, Voltage Rating=10V, AECQ=Yes, Mounting Technology="Surface Mount", Pins=2, RoHS Compliant=Yes
C27 C29 C31 C33 C61: library part CMP-001-00085-5, "Ceramic Capacitor, Multilayer, Ceramic, 10V, 20% +Tol, 20% -Tol, X5R, 15% TC, 4.7uF, Surface Mount, 0402", Capacitor Type=Ceramic, Case/Package=0402, Max Operating Temperature=85°C, Min Operating Temperature=-55°C, Package Shape=Rectangular, Rated DC Voltage (URdc)=10V, Temperature Coefficient=X5R, Tolerance=0%, Tolerance  (fill in as +-)=20%, AECQ=Yes, Dielectric Material=Ceramic, Mounting Technology="Surface Mount", Multilayer=Yes, Packaging="Tape and Reel", Pins=2, Reach SVHC Compliant=Yes, RoHS Compliant=Yes, Termination=Wraparound, Tolerance (fill in as +-)=20%, Voltage Rating=10V
  C27: PlaceNear=C27.2:U1.20:5mm
  C29: PlaceNear=C29.2:U1.43:5mm
  C31: PlaceNear=C31.2:U1.34:5mm
  C33: PlaceNear=C33.2:U1.3:5mm
C39 C44: library part CMP-001-00110-2, "Ceramic Capacitor, Multilayer, Ceramic, 100V, 10% +Tol, 10% -Tol, X7R, 15% TC, 0.0047uF, Surface Mount, 0402", Capacitor Type=Ceramic, Case/Package=0402, Max Operating Temperature=125°C, Min Operating Temperature=-55°C, Temperature Coefficient=X7R, Tolerance=10%, Voltage Rating=100V, AECQ=Yes, Mounting Technology=SMD, Pins=2, RoHS Compliant=Yes
C53: library part CMP-001-00101-2, "Ceramic Capacitor, Multilayer, Ceramic, 100V, 10% +Tol, 10% -Tol, X7R, 15% TC, 0.001uF, Surface Mount, 0402", Capacitor Type=Ceramic, Case/Package=0402, Max Operating Temperature=125°C, Min Operating Temperature=-55°C, Temperature Coefficient=X7R, Tolerance=10%, Voltage Rating=100V, AECQ=Yes, Mounting Technology=SMD, Pins=2
D1 D2: library part CMP-007-00036-1, "Red 630nm LED Indication - Discrete 2.2V 0603 (1608 Metric)", Case/Package=0603, Colour=Red, Forward Voltage=2.2V, Pins=2
D3: library part CMP-004-00038-1, "Rectifier Diode, Schottky, 1 Phase, 1 Element, 0.35A, 30V V(RRM), Silicon", Case/Package=SOD-323, Forward Current=350mA, Forward Voltage=370mV, Max Operating Temperature=125°C, Min Breakdown Voltage=30V, Min Operating Temperature=-55°C, Max Output current=350mA, Pins=2, Reverse Recovery Time=10ns, RoHS Compliant=Yes
J1 J2: library part CMP-002-00135-2, "RF / Coaxial Connector, MMCX Coaxial, Straight Jack, Surface Mount Vertical, 50 ohm", Case/Package="MMCX SMD", Manufacturer=Samtec, Manufacturer Series=MMCX, Max Current Rating=1.5A, Max Operating Temperature=125°C, Min Operating Temperature=-65°C, Voltage Rating=335V, Connector Type="MMCX, Socket", Gender=Female, Length=3.45mm, Mounting Technology="Surface Mount", Pins=2
J3: library part CMP-002-00137-2, "FPC/FFC Connector Socket 22 Position 0.5mm Top Contact Solder Right Angle Surface Mount T/R", Case/Package=22-ZIF_0.5mm, Manufacturer=Amphenol, Manufacturer Series=F32Q, Max Current Rating=500mA, Max Operating Temperature=105°C, Min Operating Temperature=-40°C, Voltage Rating=50V, Connector Type=FPC, Gender=Female, Height=2.9mm, Length=20.8mm, Pins=22, Pitch=0.5mm, RoHS Compliant=Yes, Width=5.5mm
J4: "CONN HEADER SMD 5POS 1MM", Current Rating (Amps)=0.7A, Insulation Color=Natural, Manufacturer="JST Sales America Inc.", Material Flammability Rating="UL94 V-0", Operating Temperature="-25°C ~ 85°C", Supplier Part Number 1=455-1791-1-ND, Voltage Rating=50V, ComponentLink1Description=Datasheet, ComponentLink1URL=http://www.jst-mfg.com/product/pdf/eng/eSR.pdf, ComponentLink2Description="DigiKey Link", ComponentLink2URL=http://digikey.com/product-detail/en/jst-sales-america-inc/BM05B-SRSS-TB-LF-SN/455-1791-1-ND/926862, Connector Type=Header, Contact Finish - Mating=Tin, Contact Finish - Post=Tin, Contact Material="Copper Alloy", Contact Shape=Square, Contact Type="Male Pin", Fastening Type=Push-Pull, Features="Solder Retention", Insulation Height="0.167\" (4.25mm)", Insulation Material="Polyamide (PA), Nylon", LastUpdated="1/12/2020 10:14:00 PM", Lifecycle Status=Active, Minimum Order=1, Mounting Type="Surface Mount", Number of Positions=5, Number of Positions Loaded=All, Number of Rows=1, Packaging=TapeAndReel, Part Number=BM05B-SRSS-TB(LF)(SN), Part Status=Active, PartId=18, Pitch - Mating="0.039\" (1.00mm)", Price=0.35, Series=SR, Shrouding="Shrouded - 4 Wall", Style="Board to Cable/Wire", Supplier 1=DigiKey, Termination=Solder
J5: "CONN HEADER SMD 2POS 1MM", Current Rating (Amps)=0.7A, Insulation Color=Natural, Manufacturer="JST Sales America Inc.", Material Flammability Rating="UL94 V-0", Operating Temperature="-25°C ~ 85°C", Supplier Part Number 1=455-1788-1-ND, Voltage Rating=50V, ComponentLink1Description=Datasheet, ComponentLink1URL=http://www.jst-mfg.com/product/pdf/eng/eSR.pdf, ComponentLink2Description="DigiKey Link", ComponentLink2URL=http://digikey.com/product-detail/en/jst-sales-america-inc/BM02B-SRSS-TB-LF-SN/455-1788-1-ND/926859, Connector Type=Header, Contact Finish - Mating=Tin, Contact Finish - Post=Tin, Contact Material="Copper Alloy", Contact Shape=Square, Contact Type="Male Pin", Fastening Type=Push-Pull, Features="Solder Retention", Insulation Height="0.167\" (4.25mm)", Insulation Material="Polyamide (PA), Nylon", LastUpdated="1/12/2020 10:11:04 PM", Lifecycle Status=Active, Minimum Order=1, Mounting Type="Surface Mount", Number of Positions=2, Number of Positions Loaded=All, Number of Rows=1, Packaging=TapeAndReel, Part Number=BM02B-SRSS-TB(LF)(SN), Part Status=Active, PartId=12, Pitch - Mating="0.039\" (1.00mm)", Price=0.22, Series=SR, Shrouding="Shrouded - 4 Wall", Style="Board to Cable/Wire", Supplier 1=DigiKey, Termination=Solder
L1 L2 L7 L8 L10 L11: library part CMP-006-00026-1, "Ferrite Beads Multi-Layer 1.5KOhm 25% 100MHz 500mA 500mOhm DCR 0603 T/R", Case/Package=0603, Current - Saturation=13.3A, Current Rating=400mA, Max Operating Temperature=125°C, Min Operating Temperature=-55°C, Tolerance=25%, AECQ=no, DCR=20.5m, Height=800µm, Pins=2, Shileded=Yes
L4 L13: library part CMP-006-00025-2, "IND 10UH 20% 3.1A SHD", Case/Package=0806, Current - Saturation=3.3A, Current Rating=450mA, Max Operating Temperature=105°C, Min Operating Temperature=-40°C, Self Resonant Frequency=35MHz, Tolerance=10%, AECQ=No, DCR=0.52, Height=1.6mm, Pins=2, Shileded=Yes
L6: library part CMP-006-00028-1, "Inductor Power Shielded Multi-Layer 0.47uH 20% 1MHz Ferrite 1.1A 0.19Ohm DCR 0603 T/R", Case/Package=0603, Current - Saturation=1.8A, Current Rating=1.1A, Max Operating Temperature=125°C, Min Operating Temperature=-55°C, Self Resonant Frequency=180MHz, Tolerance=20%, AECQ=No, DCR=98m, Height=800µm, Mounting Technology=SMT, Pins=2, Shileded=Yes
R1 R5: library part CMP-009-00241-1, "Fixed Resistor, Metal Glaze/Thick Film, 0.063W, 4020ohm, 50V, 1% +/-Tol, Surface Mount, 0402", Case/Package=0402, Manufacturer Part Number=Blank, Max Operating Temperature=155°C, Min Operating Temperature=-55°C, Power=62.5mW, Tolerance=1%, Voltage Rating=50V, AECQ=Yes, Mounting Technology=SMD, Pins=2
R2 R11: library part CMP-009-00240-1, "RES, 0402, 49.9 ohm, 1%, 0.1W, AUTO", Case/Package=0402, Max Operating Temperature=155°C, Min Operating Temperature=-55°C, Power=62.5mW, Tolerance=1%, Voltage Rating=50V, AECQ=Yes, Manufacturer Part Number=RMCA0402FT49R9-HP, Mounting Technology=SMD, Pins=2
R3 R4: library part CMP-009-00226-1, "Res Thick Film 0402 1.5K Ohm 5% 0.063W ±100ppm/°C Molded SMD Paper T/R", Case/Package=0402, Max Operating Temperature=155°C, Min Operating Temperature=-55°C, Power=62.5mW, Tolerance=5%, AECQ=Yes, Mounting Technology="Surface Mount", Pins=2, RoHS Compliant=Yes
R6 R25 R26 R27: library part CMP-009-00242-1, "Fixed Resistor, Thin Film, 0.1W, 10000ohm, 50V, 1% +/-Tol, 100ppm/Cel, Surface Mount, 0402", Case/Package=0402, Manufacturer Part Number=Blank, Max Operating Temperature=155°C, Min Operating Temperature=-55°C, Power=100mW, Tolerance=1%, Voltage Rating=50V, AECQ=Yes, Mounting Technology=SMD, Pins=2
R7: library part CMP-009-00227-1, "Res Thick Film 0402 75K Ohm 1% 0.063W(1/16W) ±100ppm/C Pad SMD T/R", Case/Package=0402, Max Operating Temperature=155°C, Min Operating Temperature=-55°C, Power=63mW, Tolerance=1%, AECQ=Yes, Mounting Technology=SMD, Pins=2
R8 R15: library part CMP-009-00188-7, "Fixed Resistor, Metal Glaze/thick Film, 0.0625W, 100000ohm, 50V, 1% +/-Tol, 100ppm/Cel, Surface Mount, 0402", Case/Package=0402, Manufacturer Part Number=Blank, Max Operating Temperature=155°C, Min Operating Temperature=-55°C, Package Height=0.35mm, Package Length=1mm, Package Shape=Rectangular, Package Width=0.5mm, Power=62.5mW, Rated Temperature=70°C, Resistor Type="FIXED RESISTOR", Temperature Coefficient (ppm/Cel)=100, Tolerance=1%, Working Voltage=50V, Additional Feature="LASER TRIMMABLE", AECQ=No, Construction=Chip, JESD-609 Code=e3, Mounting Technology="Surface Mount", Packaging="Tape and Reel", Pins=2, Reach SVHC Compliant=Yes, RoHS Compliant=Yes, Technology="METAL GLAZE/THICK FILM", Terminal Finish=Nickel, Termination=Wraparound
R9 R10: library part CMP-009-00198-3, "Fixed Resistor, Metal Glaze/thick Film, 0.0625W, 36000ohm, 50V, 1% +/-Tol, 100ppm/Cel, Surface Mount, 0402", Case/Package=0402, Max Operating Temperature=155°C, Min Operating Temperature=-55°C, Power=62.5mW, Tolerance=1%, AECQ=Yes, Mounting Technology=SMD, Pins=2
R12 R20 R21 R22 R23: library part CMP-009-00186-8, "Fixed Resistor, Metal Glaze/thick Film, 0.0625W, 0ohm, Surface Mount, 0402", Case/Package=0402, Manufacturer Part Number=Blank, Max Operating Temperature=155°C, Min Operating Temperature=-55°C, Package Height=0.35mm, Package Length=1mm, Package Shape=Rectangular, Package Width=0.5mm, Power=62.5mW, Rated Temperature=70°C, Resistor Type="FIXED RESISTOR", Tolerance=0%, AECQ=No, Construction=Chip, JESD-609 Code=e3, Mounting Technology="Surface Mount", Packaging="Tape and Reel", Pins=2, Reach SVHC Compliant=Yes, RoHS Compliant=Yes, Technology="METAL GLAZE/THICK FILM", Terminal Finish=Nickel, Termination=Wraparound
R13 R19: library part CMP-009-00225-1, "Res Thick Film 0402 330 Ohm 1% 0.063W ±100ppm/°C Molded SMD Paper T/R", Case/Package=0402, Max Operating Temperature=155°C, Min Operating Temperature=-55°C, Power=62.5mW, Tolerance=1%, AECQ=Yes, Mounting Technology="Surface Mount", Pins=2, RoHS Compliant=Yes
R14 R17 R18 R24: library part CMP-009-00193-3, "Fixed Resistor, Metal Glaze/thick Film, 0.125W, 22000ohm, 75V, 1% +/-Tol, 100ppm/Cel, Surface Mount, 0402", Case/Package=0402, Max Operating Temperature=155°C, Min Operating Temperature=-55°C, Power=125mW, Tolerance=1%, AECQ=Yes, Manufacturer Part Number=AC0402FR-7W22KL, Mounting Technology=SMD, Pins=2
R16: library part CMP-009-00248-1, "Resistor, 200K, 0.1W, Thick Film, 0402;", Case/Package=0402, Max Operating Temperature=155°C, Min Operating Temperature=-55°C, Power=62.5mW, Tolerance=1%, Voltage Rating=50V, AECQ=Yes, Mounting Technology="Surface Mount", Pins=2, RoHS Compliant=Yes
U1: library part CMP-010-00050-1, "Dual 2 MP FPD-Link III deserializer with CSI-2 outputs for 2MP/60fps cameras & radar 48-VQFN -40 to 105", Case/Package="48-VQFN (7x7)", Max Operating Temperature=105°C, Max Supply Voltage=3.6V, Min Operating Temperature=-40°C, Min Supply Voltage=1.71V, Nominal Supply Current=370µA, Nominal Supply Voltage=5.7V, Output Current=6A, Mounting Technology=SMD, Pins=48, Sensor Type="Current shunt amp"